# Altium PCB HVstuffPCB.PcbDoc
Units mm, origin at the board's own origin, x right, y up, seen from the top; angles counter-clockwise.
Board outline 100 x 54 mm, 2 copper layers (Top Layer, Bottom Layer); 23 components, 18 nets, 80 pads, 0 vias.
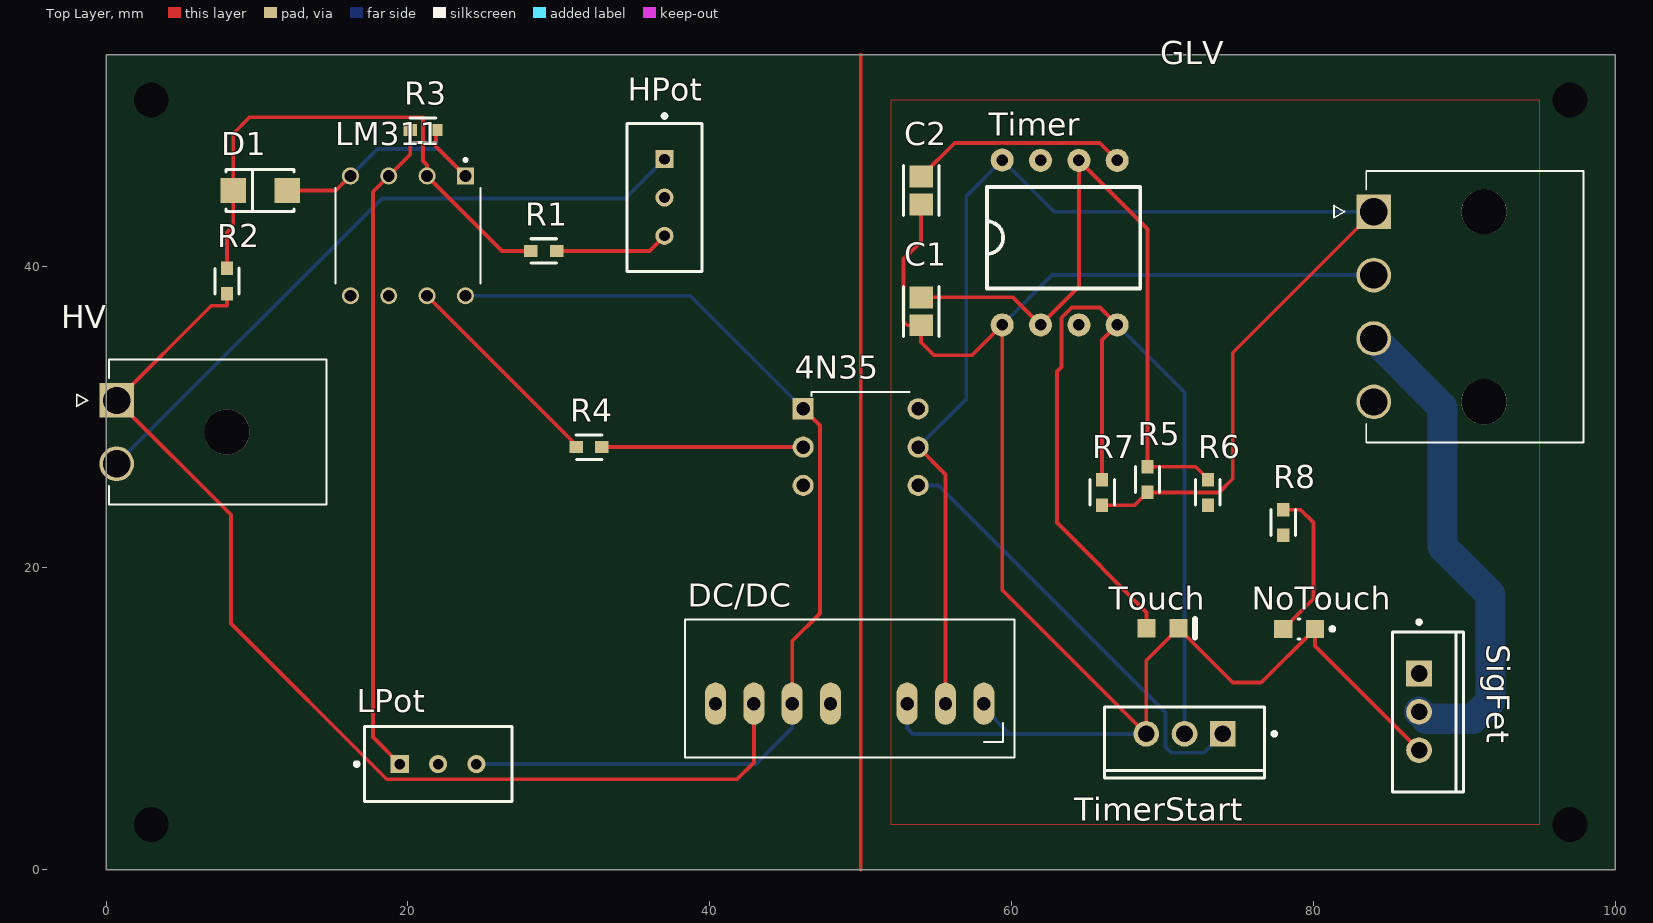
[diagram p0: Top Layer view]
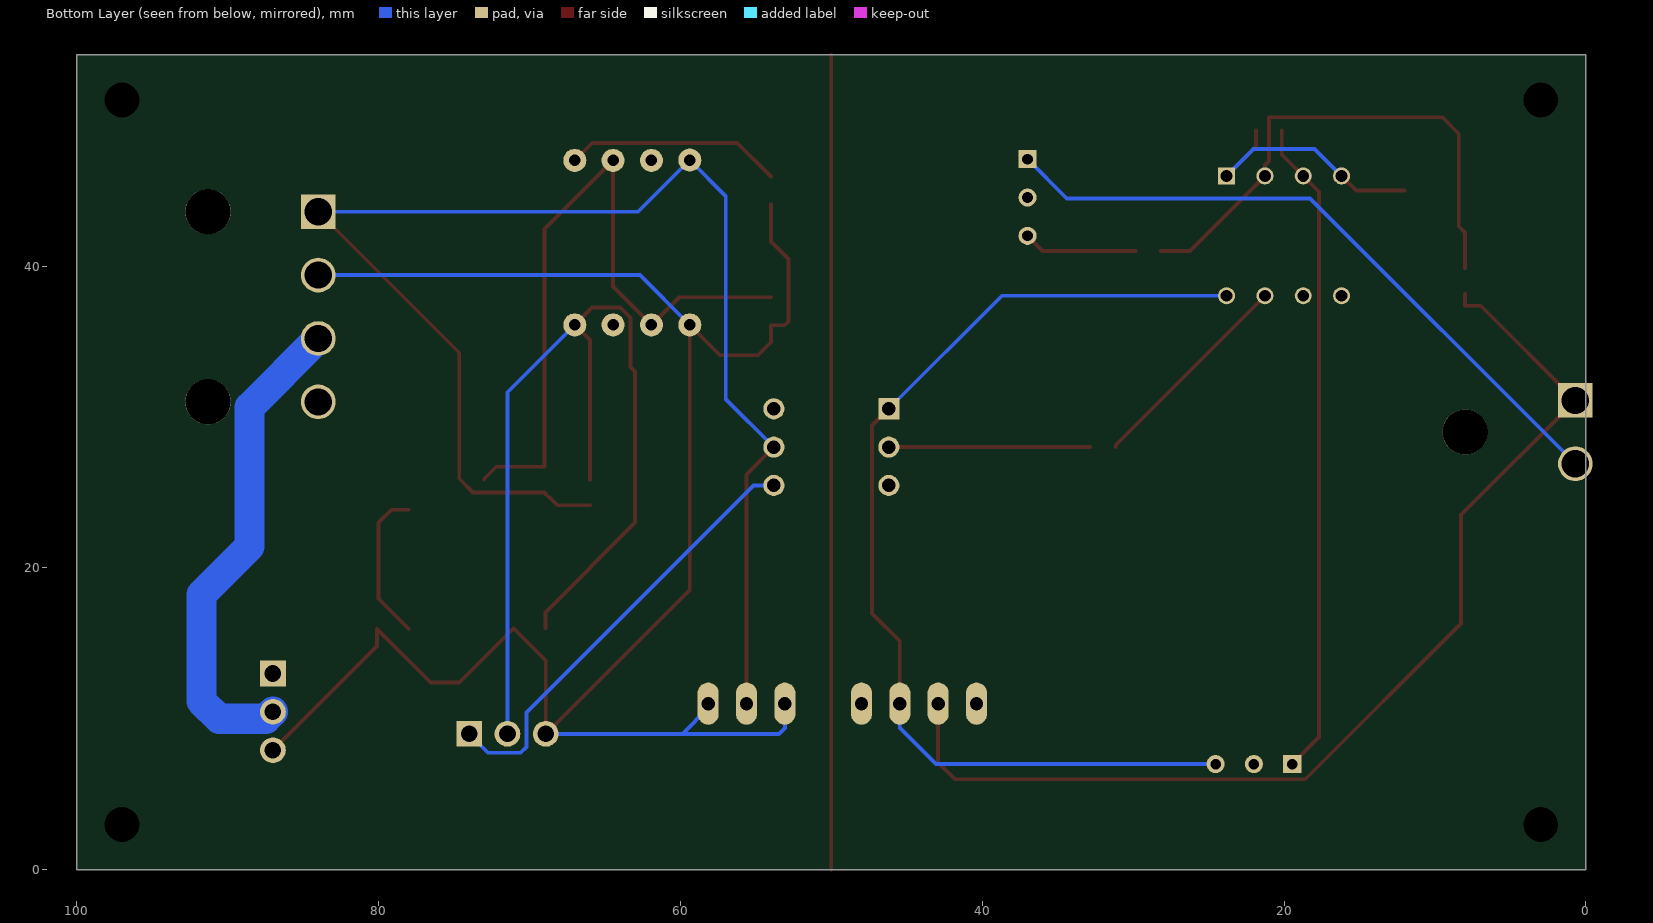
[diagram p1: Bottom Layer view, seen from below]
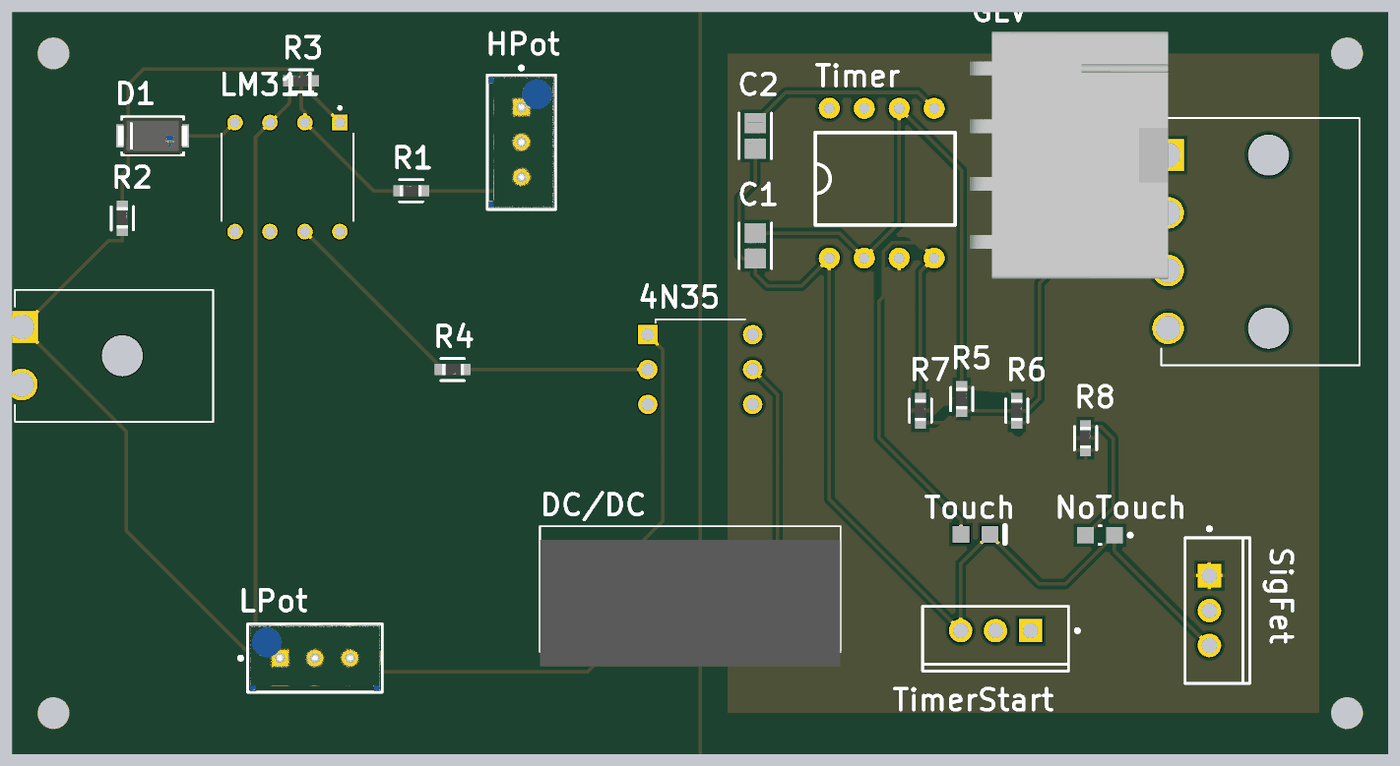
[diagram p2: 3D render of the assembled board from above, using the file's embedded part models]

## Layer stack, top to bottom
Top Solder: solder mask 0.0102, Solder Resist, Dk 3.5
Top Layer: signal copper 0.0356
Dielectric 1: dielectric 0.32, FR-4, Dk 4.8
Bottom Layer: signal copper 0.0356
Bottom Solder: solder mask 0.0102, Solder Resist, Dk 3.5

## Board outline
0,0 100,0 100,54 0,54

## Design rules (kind name [scope] priority, off if disabled: settings)
Clearance [All] p1: gap=0.254 ignorepadtopadclearanceinfootprint=FALSE
PolygonConnect [All] p1: connectstyle=Relief reliefconductorwidth=0.254 reliefentries=4 polygonreliefangle="90 Angle" airgapwidth=0.254
RoutingVias [All] p1: holewidth=0.711 width=1.27 viastyle="Through Hole" minholewidth=0.711 minwidth=1.27 maxholewidth=0.711 maxwidth=1.27
SolderMaskExpansion [All] p1: expansion=0.102 istentingtop=FALSE
Width [All] p1: maxlimit=0.254 minlimit=0.254 preferedwidth=0.254
30 further rules are at their usual default settings.

## Components (designator, comment, footprint, x,y, rotation, side; value= is the part's Value field where it differs from the comment)
4N35 "DIP-OPTOISO-3.55KV-TRANS-W/BASE-6DIP(4N35)" DIP6-2.54-7.3X6.5MM 50,28 r270 top
C1 "CL21B102KBANNNL" FP-CL21-IPC_A 54,37 r90 top
C2 "CL21B102KBANNNL" FP-CL21-IPC_A 54,45 r90 top
D1 "S1MHE3_A/H" FP-SMA-MFG 10.21,45 r0 top
DC/DC "SPAN02A-12" SPAN02 49.27,11 r180 top
GLV "1726480104" MOLEX_1726480104 84,43.6 r90 top
HPot "3296W-1-103LF" FP-3296W-MFG 37.005,44.54 r180 top
HV "1726480102" MOLEX_1726480102 0.7,31.1 r90 top
LM311 "LM311P" DIP794W45P254L959H508Q8 20,42 r270 top
LPot "3296W-1-103LF" FP-3296W-MFG 22,7.005 r270 top
NoTouch "HSMS-C170" FP-HSMS-C170-MFG 79.05,15.95 r180 top
R1 "RT0603FRE0739K2L" FP-RT0603-MFG 29,41 r180 top value=39.2KΩ
R2 "RT0603FRE0739K2L" FP-RT0603-MFG 8,39 r90 top value=39.2KΩ
R3 "RT0603FRE0739K2L" FP-RT0603-MFG 21,49 r180 top value=39.2KΩ
R4 "RT0603FRE0739K2L" FP-RT0603-MFG 32,28 r0 top value=39.2KΩ
R5 "RT0603FRE0739K2L" FP-RT0603-MFG 69,25.85 r90 top value=39.2KΩ
R6 "RT0603FRE0739K2L" FP-RT0603-MFG 73,25 r90 top value=39.2KΩ
R7 "RT0603FRE0739K2L" FP-RT0603-MFG 66,25 r90 top value=39.2KΩ
R8 "RT0603FRE0739K2L" FP-RT0603-MFG 78,23 r90 top value=39.2KΩ
SigFet "IRF540" VISH-TO-220AB-3_A 87,10.46 r0 top
Timer "NE555P-555 timer" "NE555P-555 timer-Footprint-1" 67,36.1 r90 top
TimerStart "IRF540" VISH-TO-220AB-3_A 71.46,9 r270 top
Touch "HSMG-C170" AVAG-HSMX-C170_V 70,16 r0 top

## Footprints (in the part's own frame and the unit in brackets; to place one, negate y for a bottom-side part, rotate by r counter-clockwise, add the part's x,y. Pads: shape width x height; smd on the part's side, far side on the other; paste and mask are expansions set on the pad)
AVAG-HSMX-C170_V [mm] "SMD, 2-Leads, Body 2x1.25mm, Height 0.8mm"
  rect 1.2x1.2 smd: 1(-1.05,0) 2(1.05,0)
  silkscreen extent 2.15,-0.63 2.15,0.63, body extent -1,-0.63 1,0.63, height 0.8
DIP6-2.54-7.3X6.5MM [mm]
  rect 1.4x1.4 hole 0.9: 1(-2.54,-3.81)
  round 1.4 hole 0.9: 2(0,-3.81) 3(2.54,-3.81) 4(2.54,3.81) 5(0,3.81) 6(-2.54,3.81)
  silkscreen extent -3.65,-3.25 -3.4,3.25
DIP794W45P254L959H508Q8 [mm]
  rect 1.13x1.13 hole 0.78: 1(-3.97,3.81)
  round 1.13 hole 0.78: 2(-3.97,1.27) 3(-3.97,-1.27) 4(-3.97,-3.81) 5(3.97,-3.81) 6(3.97,-1.27) 7(3.97,1.27) 8(3.97,3.81)
  silkscreen extent -5.13,-4.8 3.17,4.8
FP-3296W-MFG [mm]
  rect 1.2x1.2 hole 0.7 paste-2539.97 mask+0: 1(0.005,-2.54)
  round 1.2 hole 0.7 paste-2539.97 mask+0: 2(0.005,0) 3(0.005,2.54)
  silkscreen extent -2.48,-5.52 2.48,4.89, body extent -2.58,-4.99 2.58,4.99, height 0.25
FP-CL21-IPC_A [mm]
  rect 1.455x1.556 smd paste+0 mask+0: 1(-0.926,0) 2(0.926,0)
  silkscreen extent -1.65,-1.18 1.65,1.18, body extent -2.15,-1.28 2.15,1.28, height 0.25
FP-HSMS-C170-MFG [mm]
  rect 1.2x1.2 smd paste+0 mask+0: 1(-1.05,0) 2(1.05,0)
  silkscreen extent -2.33,-0.67 0.07,0.67
FP-RT0603-MFG [mm]
  rect 0.9x0.8 smd paste+0 mask+0: 1(-0.85,0) 2(0.85,0)
  silkscreen extent -0.85,-0.81 0.86,0.8, body extent -1.4,-0.55 1.4,0.55, height 0.25
FP-SMA-MFG [mm]
  rect 1.7x1.68 smd paste+0 mask+0: 1(-1.79,0) 2(1.79,0)
  silkscreen extent -2.25,-1.4 2.25,1.39, body extent -2.74,-1.5 2.74,1.5, height 0.25
MOLEX_1726480102 [mm]
  rect 2.3x2.3 / inner round 2.3 / far side rect 2.3x2.3 hole 1.8 mask+0.076: 1(0,0)
  round 2.3 hole 1.8 mask+0.076: 2(-4.2,0)
  round 3 hole 3 unplated mask+0.076: ""(-2.1,-7.3)
  silkscreen extent -6.9,-13.9 2.7,2.65
MOLEX_1726480104 [mm]
  rect 2.3x2.3 / inner round 2.3 / far side rect 2.3x2.3 hole 1.8 mask+0.076: 1(0,0)
  round 2.3 hole 1.8 mask+0.076: 2(-4.2,0) 3(-8.4,0) 4(-12.6,0)
  round 3 hole 3 unplated mask+0.076: ""(-12.6,-7.3) ""(0,-7.3)
  silkscreen extent -15.3,-13.9 2.7,2.65, body extent -9,0 9,14.4, height 7.2
"NE555P-555 timer-Footprint-1" [mil]
  round 60 hole 30: 1(0,300) 2(0,200) 3(0,100) 4(0,0) 5(429.13,0) 6(429.13,100) 7(429.13,200) 8(429.92,300)
  silkscreen extent 95,-60 360,340
SPAN02 [mil]
  oval 55x110 hole 35: 1(-350,0) 2(-250,0) 3(-150,0) 5(50,0) 6(150,0) 7(250,0) 8(350,0)
  silkscreen extent -430,-220 430,140, body extent -429,-181 429,181, height 437
VISH-TO-220AB-3_A [mm] "FM, 3-Leads, Body 10.55x4.65mm, Pitch 2.54mm"
  rect 1.7x1.7 hole 1.1: 1(0,2.54)
  round 1.7 hole 1.1: 2(0,0) 3(0,-2.54)
  silkscreen extent -1.77,-5.3 2.93,6.07, body extent -1.74,-5.28 2.91,5.28, height 19.31

## Part data
4N35: "Optoisolator Transistor with Base Output 5000Vrms 1 Channel 6-DIP", Package="DIP-6 Texas Instruments", Availability=Good, Check_prices=https://www.snapeda.com/parts/4N35/Vishay%20Semiconductor%20Opto%20Division/view-part/579099/?ref=eda, MF=Vishay, MP=4N35, Price=None, Purchase-URL=https://pricing.snapeda.com/search/part/4N35/?ref=eda, SnapEDA_Link=https://www.snapeda.com/parts/4N35/Vishay%20Semiconductor%20Opto%20Division/view-part/579099/?ref=snap
C1 C2: library part CMP-13271-003493-1, "CL21 Series 0805 1nF 50V ±10% Tolerance X7R Multilayer Ceramic Chip Capacitor", Capacitance=1nF, Case/Package=0805, Dielectric=X7R, Max Operating Temperature=125°C, Min Operating Temperature=-55°C, Package Quantity=15000, Tolerance=10%, Voltage=50V, Depth=1.25mm, Height=0.65mm, Lead Free="Lead Free", Length=2mm, Mount="Surface Mount", Packaging="Tape and Reel", Radiation Hardening=No, Thickness=0.03inch, Voltage Rating=50V, Voltage Rating (DC)=50V, Width=0.049inch
D1: library part CMP-02540-000086-1, "DIODE GEN PURP 1KV 1A DO214AC", Average Rectified Current=1A, Case/Package=SMA, Forward Voltage=1.1V, Max Operating Temperature=150°C, Max Reverse Voltage (DC)=1kV, Min Operating Temperature=-55°C, Peak Non-Repetitive Surge Current=30A, Mount="Surface Mount", Number of Pins=2, Packaging="Tape and Reel", Reverse Recovery Time=1.8us, RoHS Compliant=Yes, Series=-
DC/DC: "Isolated Module DC DC Converter 1 Output 12V - - - 167mA 9V - 18V Input", Package="SIP-8 MEAN WELL", Check_prices=https://www.snapeda.com/parts/SPAN02A-12/Mean+Well/view-part/?ref=eda, MF="MEAN WELL USA Inc.", MP=SPAN02A-12, SnapEDA_Link=https://www.snapeda.com/parts/SPAN02A-12/Mean+Well/view-part/?ref=snap
GLV: "Connector Header Through Hole, Right Angle 4 position 0.165in (4.20mm)", Package=None, Availability=Unavailable, MP=1726480104, Price=None
HPot LPot: library part CMP-1747-00001-8, "TRIMMER 10K OHM 0.5W PC PIN TOP", Color=Blue, Insulation Resistance=1GR, Max Operating Temperature=125°C, Max Power Dissipation=500mW, Min Operating Temperature=-55°C, Package Quantity=50, Resistance=10kR, Resistance Tolerance=10%, Resistor Type=Cermet, Temperature Coefficient=100ppm/°C, Contact Plating=Tin, Depth=4.83mm, Height=11.55mm, Lead Free="Lead Free", Length=9.53mm, Military Standard=Not, Mount="Through Hole", Number of Turns=25, Packaging=Rail/Tube, Power Rating=500mW, Radiation Hardening=No, Reach SVHC Compliant=Yes, RoHS Compliant=Yes, Series=3296, Taper=Linear, Technology=CERMET, Termination=Pin, Tolerance=10%, Weight=0.03oz, Width=9.53mm
HV: "Connector Header Through Hole, Right Angle 2 position 0.165in (4.20mm)", Package=None, Availability=Unavailable, MP=1726480102, Price=None
LM311: "High Speed, 30V, Differential Comparator With Strobes 8-PDIP 0 to 70", Package="PDIP-8 Texas Instruments", Availability=Good, DigiKey-Purchase-URL=https://snapeda.com/shop?store=DigiKey&id=2748658, MF="Texas Instruments", Mouser-Purchase-URL=https://snapeda.com/shop?store=Mouser&id=2748658, MP=LM311P, Price=None, SnapEDA_Link=https://www.snapeda.com/parts/LM311P/Texas%20Instruments/view-part/2748658/?ref=snap, Texas_Instruments-Purchase-URL=https://snapeda.com/shop?store=Texas+Instruments&id=2748658
NoTouch: library part CMP-18399-000018-1, "LED RED DIFFUSED CHIP SMD", Case Code (Imperial)=0805, Case Code (Metric)=2012, Color=Red, Forward Current=20mA, Forward Voltage=2.1V, Lens Color=White, Max Operating Temperature=85°C, Min Operating Temperature=-40°C, Package Quantity=1, Power Dissipation=52mW, Reverse Voltage=5V, Case/Package=0805, Depth=1.25mm, Dominant Wavelength=626nm, Height=0.8mm, Illumination Color=Red, Lead Free="Lead Free", Length=2mm, Lens Style=Diffused, Lens Transparency=Diffused, Luminous Intensity=10mcd, Mount="Surface Mount", Number of Elements=1, Number of LEDs=1, Number of Pins=2, Number of Terminals=2, Packaging="Tape and Reel", Power Rating=52mW, Radiation Hardening=No, REACH SVHC="No SVHC", Shape=Rectangular, Test Current=20mA, Viewing Angle=170°, Wavelength=626nm, Width=1.25mm
R1 R2 R3 R4 R5 R6 R7 R8: library part CMP-2000-04739-2, "RES SMD 39.2K OHM 1% 1/10W 0603", Manufacturer=Yageo, Package=RT0603, Power Rating=0.1W, Resistance=39.2KΩ, Temperature="-55°C to +155°C", Temperature Coefficient="50 ppm/°C", Temperature Range High=+155°C, Temperature Range Low=-55°C, Tolerance=0.01, Voltage Rating=75V, Automotive=No, Category=Res, ComponentLink2Description=Datasheet, ComponentLink2URL=http://www.yageo.com/documents/recent/PYu-RT_1-to-0.01_RoHS_L_9.pdf, Composition="Thin Film", Device Class L1="Passive Components", Device Class L2=Resistors, Device Class L3="Chip SMD Resistors", Digikey Description="RES SMD 39.2K OHM 1% 1/10W 0603", Footprint Url=http://www.yageo.com/exep/pages/download/literatures/PYu-R_Mount_10.pdf, Height=0.55mm, Ipc Land Pattern Name=RESC16080X45, Lead Free=Yes, Manufacturer Part Number=RT0603FRE0739K2L, Mouser Description="Thin Film Resistors - SMD 1/10W 39.2K ohm 1% 50ppm", Octopart=https://octopart.com/rt0603fre0739k2l-yageo-1367269, RoHS=TRUE, Series=RT
SigFet TimerStart: library part CMP-2000-06461-1, "Power MOSFET, 100 VDS, -55 to 175 degC, 3-Pin TO-220AB, RoHS, Tube", Id - Continuous Drain Current=28A, Manufacturer=Vishay, Maximum Operating Temperature=+175C, Minimum Operating Temperature=-55C, Package / Case=TO-220-3, Package Description="3-Pin Flange Mount, Body 10.275 x 4.45 mm, Pitch 2.54 mm", Package Reference=TO-220AB-3, Pd - Power Dissipation=150W, Rds On - Drain-Source Resistance=77mOhms, Vds - Drain-Source Breakdown Voltage=100V, Vgs - Gate-Source Voltage=20V, &lt;PCN&gt;=http://www.mouser.com/PCN/Vishay_SIL_0182015.pdf, Brand=VishaySemiconductors, Channel Mode=Enhancement, Configuration=Single, Datasheet URL=http://www.vishay.com/docs/91021/91021.pdf, Datasheet Version="Rev. B, 03/2011", Factory Pack Quantity=50, Fall Time=43ns, Height=9.01mm, Length=10.51mm, Manufacturer URL=http://www.vishay.com/, Mounting Style=ThroughHole, Mounting Technology=ThroughHole, Number of Channels=1Channel, Package URL=http://www.vishay.com/docs/71195/to220ab.pdf, Packaging=Tube, Product Category=MOSFET, Rise Time=44ns, RoHS=NoRoHSVersionAvailable, Technology=Si, Transistor Polarity=N-Channel, Transistor Type=1N-Channel, Typical Turn-Off Delay Time=53ns, Typical Turn-On Delay Time=11ns, Unit Weight=0.211644oz, Width=4.7mm
Timer: library part CMP-003-00030-1, "555 timer"
Touch: library part CMP-2000-05062-1, "Chip LED, Green, 2.2 V, -40 to 85 degC, 2-Pin SMD, Pb-Free, Tape and Reel", Forward Current If=20mA, Forward Voltage=2.2V, Forward Voltage VF Max=2.6V, LED Colour=Green, Manufacturer=Avago, Operating Temperature Max=85degC, Operating Temperature Min=-30degC, Operating Temperature Range=-30degCto+85degC, Opto Case Style=SMD, Package Description="2-Pin Surface Mount Device, Body 2 x 1.25 mm, Height 0.8 mm", Package Reference=HSMX-C170, Storage Temperature Min=-40degC, Bulb Size=1.25mmx1.4mm, Datasheet URL=https://datasheet.ciiva.com/29280/180495-da-01-en-chip-led-hsmg-c170-gelb-gruen-29280971.pdf, Datasheet Version=Oct-08, Dominant Wavelength=572nm, Dominant Wavelength Typ=572nm, External Depth=0.8mm, External Length / Height=2mm, External Width=1.25mm, Forward Current If Max=20mA, LED Mounting=SMD, LED Type=Standard, Lens Shape=Rectangular, Light Area Height=1mm, Luminous Intensity=15mcd, Luminous Intensity Min=4mcd, Luminous Intensity Typ=15mcd, Manufacturer URL=http://www.avagotech.com/, Mounting Type=SMD, MSL=MSL2A-4weeks, No. of Pins=2, Opto Mounting Orientation=Top, Packaging=CutTape, Peak Forward Current=20mA, Peak Wavelength=570nm, PIV Max=5V, Storage Temperature Max=85degC, SVHC=NoSVHC(16-Jun-2014), Viewing Angle=170deg, Voltage Vf Typ=2.2V, Wavelength Typ=570nm

## Free pads (board coordinates)
  round 0 hole 2.3: 7(3,3) 8(97,3) 9(97,51) 10(3,51)

## Nets (pads, with @x,y where several pads share a name; then routed paths per layer and width w, separated by ;. In a path a pad name is that pad's centre, name@x,y a point inside that pad or via, vN(x,y) a via of type N, cw(c..) or ccw(c..) an arc to the next point about the centre after c; other vN are vias at no path point)
Net4N35_1: 4N35.1 DC/DC.6 LM311.8 LPot.3 | length 69.8
  Top Layer w0.254: DC/DC.6 45.46,15.132 47.295,16.967 47.295,29.435 4N35.1
  Bottom Layer w0.254: LM311.8 38.7,38.03 4N35.1 ; LPot.3 43.062,7 45.46,9.398 DC/DC.6
Net4N35_2: 4N35.2 R4.2 | length 13.3
  Top Layer w0.254: R4.2 4N35.2
Net4N35_4: 4N35.4 TimerStart.1 | length 29.4
  Bottom Layer w0.254: 4N35.4 55.16,25.46 70.206,10.414 70.206,8.128 70.587,7.747 72.747,7.747 TimerStart.1
Net4N35_5: 4N35.5 DC/DC.2 GLV.1 R5.1 R7.1 Timer.8 | length 96.1
  Top Layer w0.254: 4N35.5 55.62,26.19 DC/DC.2 ; R7.1 68.15,24.15 68.677,24.677 68.727,24.677 69,24.95 R5.1 ; R5.1@69,24.996 69.342,24.994 73.736,24.994 74.651,25.908 74.651,34.251 GLV.1
  Bottom Layer w0.254: 4N35.5 57,31.19 57,44.64 Timer.8 62.8,43.6 GLV.1
NetC1_1: C1.1 C2.1 DC/DC.1 DC/DC.3 GLV.2 NoTouch.1 SigFet.3 Timer.1 TimerStart.3 Touch.2 | length 125.3
  Top Layer w0.254: C2.1 54,41.63 52.832,40.462 52.832,36.328 53.086,36.074 C1.1 54,34.951 54.864,34.087 57.367,34.087 Timer.1 59.38,18.54 TimerStart.3 68.92,13.87 Touch.2 74.655,12.395 76.545,12.395 NoTouch.1 80.1,14.82 SigFet.3
  Bottom Layer w0.254: DC/DC.3 53.08,9.398 53.478,9 59.867,9 ; DC/DC.1 58.16,10.707 59.867,9 ; Timer.1 62.68,39.4 GLV.2 ; TimerStart.3 59.867,9
NetC1_2: C1.2 R5.2 R6.2 Timer.2 Timer.6 | length 47.2
  Top Layer w0.254: C1.2 60.094,37.926 Timer.2 64.46,38.64 Timer.6 69,42.46 R5.2 72.2,26.7 73,25.9 R6.2
NetC2_2: C2.2 Timer.5 | length 14.4
  Top Layer w0.254: C2.2 56.233,48.158 59.277,48.158 cw(c59.38,47.02) 59.483,48.158 65.842,48.158 Timer.5
NetD1_1: D1.1 LM311.2 R1.2 R2.2 | length 35.1
  Top Layer w0.254: R2.2 8,42.215 8.42,42.635 D1.1 8.42,48.768 9.512,49.86 21.006,49.86 21.006,46.965 21.27,46.7 LM311.2 26.24,41 R1.2
NetD1_2: D1.2 LM311.1 LM311.4 R3.1 | length 17.5
  Top Layer w0.254: D1.2 15.22,45 LM311.4 ; R3.1 21.85,47.93 LM311.1
  Bottom Layer w0.254: LM311.4 17.972,47.752 22.028,47.752 LM311.1
NetDC/DC_7: DC/DC.7 HV.1 R2.1 | length 71.9
  Top Layer w0.254: R2.1 8,37.363 6.963,37.363 HV.1 8.28,23.52 8.28,16.307 18.593,5.994 41.802,5.994 42.92,7.112 DC/DC.7
NetGLV_3: GLV.3 SigFet.2 | length 32.6
  Bottom Layer w2: GLV.3 88.546,30.654 88.546,21.421 91.735,18.233 91.735,11.172 90.563,10 87.46,10 SigFet.2
NetHPot_1: HPot.1 HV.2 | length 44.7
  Bottom Layer w0.254: HV.2 18.275,44.475 34.395,44.475 HPot.1
NetHPot_3: HPot.3 R1.1 | length 7.6
  Top Layer w0.254: R1.1 36,41 HPot.3
NetLM311_3: LM311.3 LPot.1 R3.2 | length 43.8
  Top Layer w0.254: LPot.1 17.678,8.782 17.678,44.918 LM311.3 20.15,47.39 R3.2
NetLM311_7: LM311.7 R4.1 | length 14.1
  Top Layer w0.254: LM311.7 31.15,28.15 R4.1
NetNoTouch_2: NoTouch.2 R8.2 | length 10.2
  Top Layer w0.254: NoTouch.2 80,17.95 80,23 79.15,23.85 R8.2
NetR6_1: R6.1 R8.1 SigFet.1 Timer.3
NetR7_2: R7.2 Timer.4 TimerStart.2 Touch.1 | length 67.2
  Top Layer w0.254: R7.2 66,35.1 Timer.4 65.857,37.243 63.987,37.243 63.317,36.573 63.317,33.317 63,33 63,23 68.95,17.05 Touch.1
  Bottom Layer w0.254: Timer.4 71.46,31.64 TimerStart.2
pads on no net: 4N35.3 4N35.6 DC/DC.5 DC/DC.8 GLV. GLV.4 HPot.2 HV. LM311.5 LM311.6 LPot.2 Timer.7
copper on no net: | length 54
  Top Layer w0.254: 50,0 50,54

## Polygon pours and split planes (outlines as drawn)
NetR6_1 on Top Layer "NONET_L01_P001" (solid, shelved, pour order 1): 52,3 95,3 95,51 52,51

## Text inside footprints (layer, text, board x,y; h text height)
GLV: Mechanical 13 "NPTH D3.00+/-0.05" at 81.58,27 h0.5 r90; Mechanical 13 "PTH D1.80+/-0.05" at 80.58,27 h0.5 r90
HV: Mechanical 13 "PTH D1.80+/-0.05" at -2.466,22.9 h0.5 r90; Mechanical 13 "NPTH D3.00+/-0.05" at -1.72,22.9 h0.5 r90